# Altium PCB INA180_Breakout.PcbDoc
Units mil, origin at the board's own origin, x right, y up, seen from the top; angles counter-clockwise.
Board outline 750 x 350 mil, 2 copper layers (Top Layer, Bottom Layer); 5 components, 5 nets, 14 pads, 0 vias.
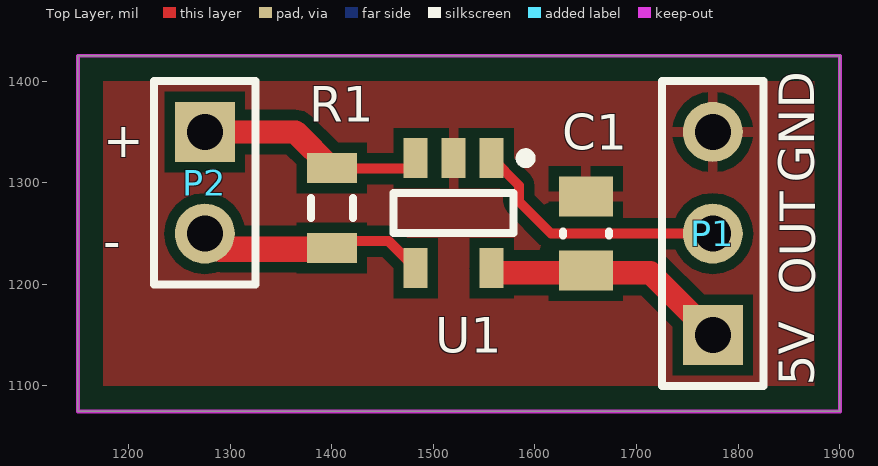
[diagram p0: Top Layer view]
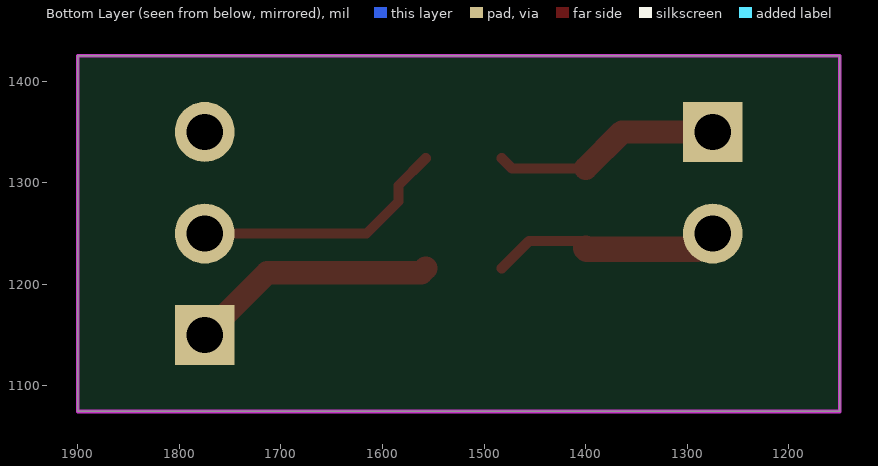
[diagram p1: Bottom Layer view, seen from below]
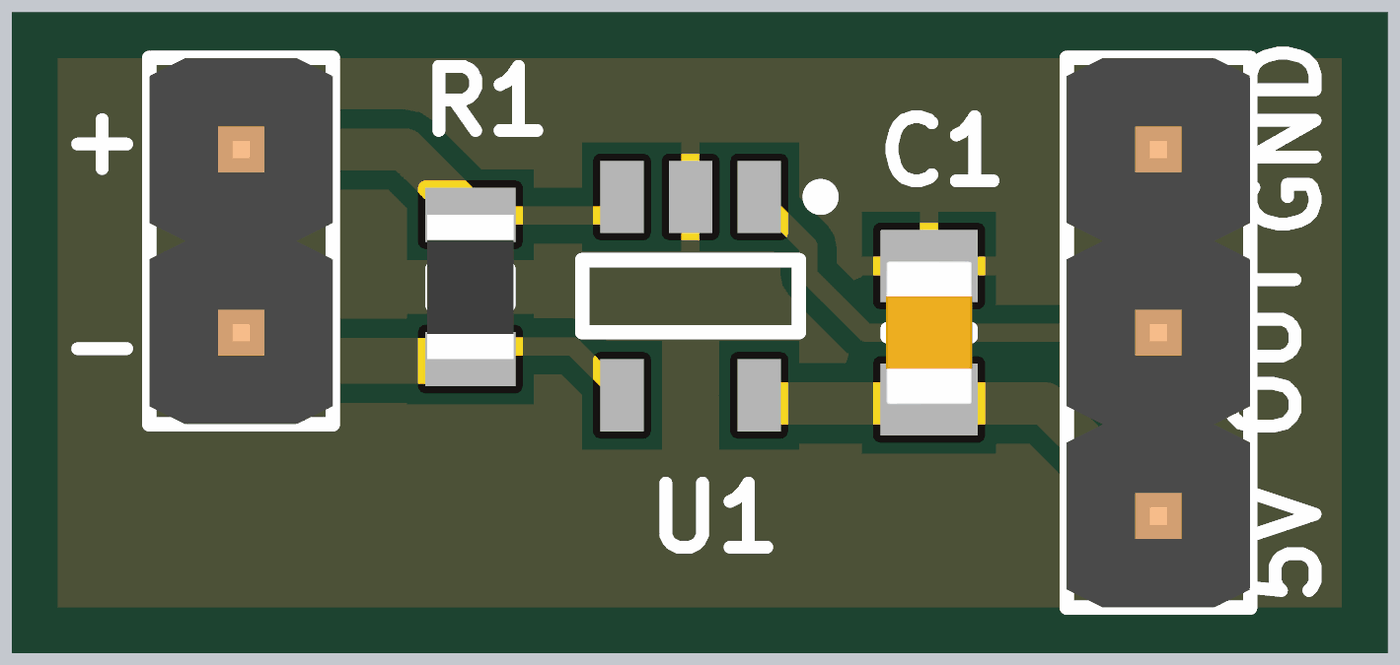
[diagram p2: 3D render of the assembled board from above, using the file's embedded part models]

## Layer stack, top to bottom
Top Solder: solder mask 0.4, Solder Resist, Dk 3.5
Top Layer: signal copper 1.4
Dielectric 1: dielectric 12.6, FR-4, Dk 4.8
Bottom Layer: signal copper 1.4
Bottom Solder: solder mask 0.4, Solder Resist, Dk 3.5

## Board outline
1150,1075 1900,1075 1900,1425 1150,1425

## Design rules (kind name [scope] priority, off if disabled: settings)
Clearance [All] p1: gap=10 ignorepadtopadclearanceinfootprint=FALSE except(0: Arc-Hole Track-Hole SMDPad-Hole THPad-Hole Via-Hole Fill-Hole Poly-Hole Region-Hole Text-Hole)
PolygonConnect [All] p1: connectstyle=Relief reliefconductorwidth=10 reliefentries=4 polygonreliefangle="90 Angle" airgapwidth=10
RoutingVias [All] p1: holewidth=28 width=50 viastyle="Through Hole" minholewidth=28 minwidth=50 maxholewidth=28 maxwidth=50
SolderMaskExpansion [All] p1: expansion=4 istentingtop=FALSE
Width [All] p1: maxlimit=50 minlimit=10 preferedwidth=10 bottomlayer_maxwidth=10 minimp=50.000000 maximp=50.000000 favimp=50.000000
30 further rules are at their usual default settings.

## Components (designator, comment, footprint, x,y, rotation, side; value= is the part's Value field where it differs from the comment)
C1 "Capacitor - Nonpolarized" "0805 - Capacitor" 1650,1250 r270 top value=100nF
P1 "1x3 Header" HDR1X3 1775,1150 r90 top
P2 "1x2 Header" HDR1X2 1275,1350 r270 top
R1 "Resistor" "0805 - Resistor" 1400,1275 r270 top value=100m
U1 "INA180" INA180 1520,1270 r270 top

## Footprints (in the part's own frame and the unit in brackets; to place one, negate y for a bottom-side part, rotate by r counter-clockwise, add the part's x,y. Pads: shape width x height; smd on the part's side, far side on the other; paste and mask are expansions set on the pad)
"0805 - Capacitor" [mm] "0805 Chip Capacitor - IPC Medium Density"
  rect 1x1.35 smd: 1(-0.925,0) 2(0.925,0)
  silkscreen extent -0.05,-0.58 0.05,0.58, body extent -1,-0.6 1,0.6, height 1.2
"0805 - Resistor" [mm] "0805 Chip Resistor - IPC Medium Density"
  rect 0.75x1.25 smd: 1(-1,0) 2(1,0)
  silkscreen extent -0.25,-0.53 0.25,0.53, body extent -1,-0.6 1,0.6, height 0.5
HDR1X2 [mm] "Connector; Header; 2 Position"
  rect 1.5x1.5 hole 0.9: 1(0,0)
  round 1.5 hole 0.9: 2(2.54,0)
  silkscreen extent -1.27,-1.27 3.81,1.27, body extent -1.27,-1.27 3.81,1.27, height 8.54
HDR1X3 [mm] "Connector; Header; 3 Position"
  rect 1.5x1.5 hole 0.9: 1(0,0)
  round 1.5 hole 0.9: 2(2.54,0) 3(5.08,0)
  silkscreen extent -1.27,-1.27 6.35,1.27, body extent -1.27,-1.27 6.35,1.27, height 8.54
INA180 [mm] "SOT23, 5-Leads, Body 2.80x2.80mm, Pitch 0.95mm, IPC Medium Density"
  rect 1x0.6 smd: 1(-1.375,0.95) 2(-1.375,0) 3(-1.375,-0.95) 4(1.375,-0.95) 5(1.375,0.95)
  silkscreen extent -1.5,-1.5 0.5,1.93, body extent -0.88,-1.5 0.87,1.5, height 1.1

## Part data
C1: "Nonpolarized Capacitor", Manufacturer=Yageo, Manufacturer Part Number=CC0805KRX7R9BB104, Supplier Part Number=311-1140-1-ND
P1: "1x3 Pin Header"
P2: "1x2 Pin Header"
R1: Manufacturer=CTS, Manufacturer Part Number=73L3R10J, Supplier Part Number=73L3R10JCT-ND
U1: "0V to 26V Current Sense Amplifier", Manufacturer="Texas Instruments", Manufacturer Part Number=INA180A2IDBVR, Datasheet=https://www.ti.com/lit/ds/symlink/ina180.pdf, Parameter 4=296-47653-1-ND

## Nets (pads, with @x,y where several pads share a name; then routed paths per layer and width w, separated by ;. In a path a pad name is that pad's centre, name@x,y a point inside that pad or via, vN(x,y) a via of type N, cw(c..) or ccw(c..) an arc to the next point about the centre after c; other vN are vias at no path point)
+5: C1.2 P1.1 U1.5 | length 244.9
  Top Layer w23: U1.5 1561.85,1211.42 1650,1211.42 1713.55,1211.42 P1.1
GND: C1.1 P1.3 U1.2
NetP1_2: P1.2 U1.1 | length 257.5
  Top Layer w10: U1.1 1584.23,1297.31 1584.23,1281.54 1615.77,1250 1631.54,1250 P1.2
NetP2_1: P2.1 R1.1 U1.3 | length 226.8
  Top Layer w10: R1.1 1400.43,1313.94 1472.4,1313.94 U1.3
  Top Layer w23: P2.1 1364.37,1350 R1.1
NetP2_2: P2.2 R1.2 U1.4 | length 225.4
  Top Layer w10: R1.2@1400,1242.52 1455.94,1242.52 U1.4
  Top Layer w25: P2.2 1290.36,1234.64 1399.01,1234.64 R1.2

## Polygon pours and split planes (outlines as drawn)
no net on Top Overlay "NONET_L-01_P-001" (solid): 1025,1025
GND on Top Layer "GND_L01_P000" (solid, pour order 0): 1175,1400 1875,1400 1875,1100 1175,1100

## Keep-outs
Keep-Out Layer:
  the board outline again, w3.94

## Silkscreen, mask and mechanical layers (free items; w line width, h text height)
Top Overlay:
  text "+" at 1175,1325 h35
  text "GND" at 1875,1300 h35 r90
  text "-" at 1175,1225 h35
  text "OUT" at 1875.7,1189.71 h35 r90
  text "5V" at 1875,1100 h35 r90